# Altium PCB TMC2209_V30.PcbDoc
Units mil, origin at the board's own origin, x right, y up, seen from the top; angles counter-clockwise.
Board outline 590 x 800 mil, 4 copper layers (Top Layer, Signal Layer 1, Signal Layer 2, Bottom Layer), stack 63.036 mil thick; 22 components, 28 nets, 86 pads, 58 vias.
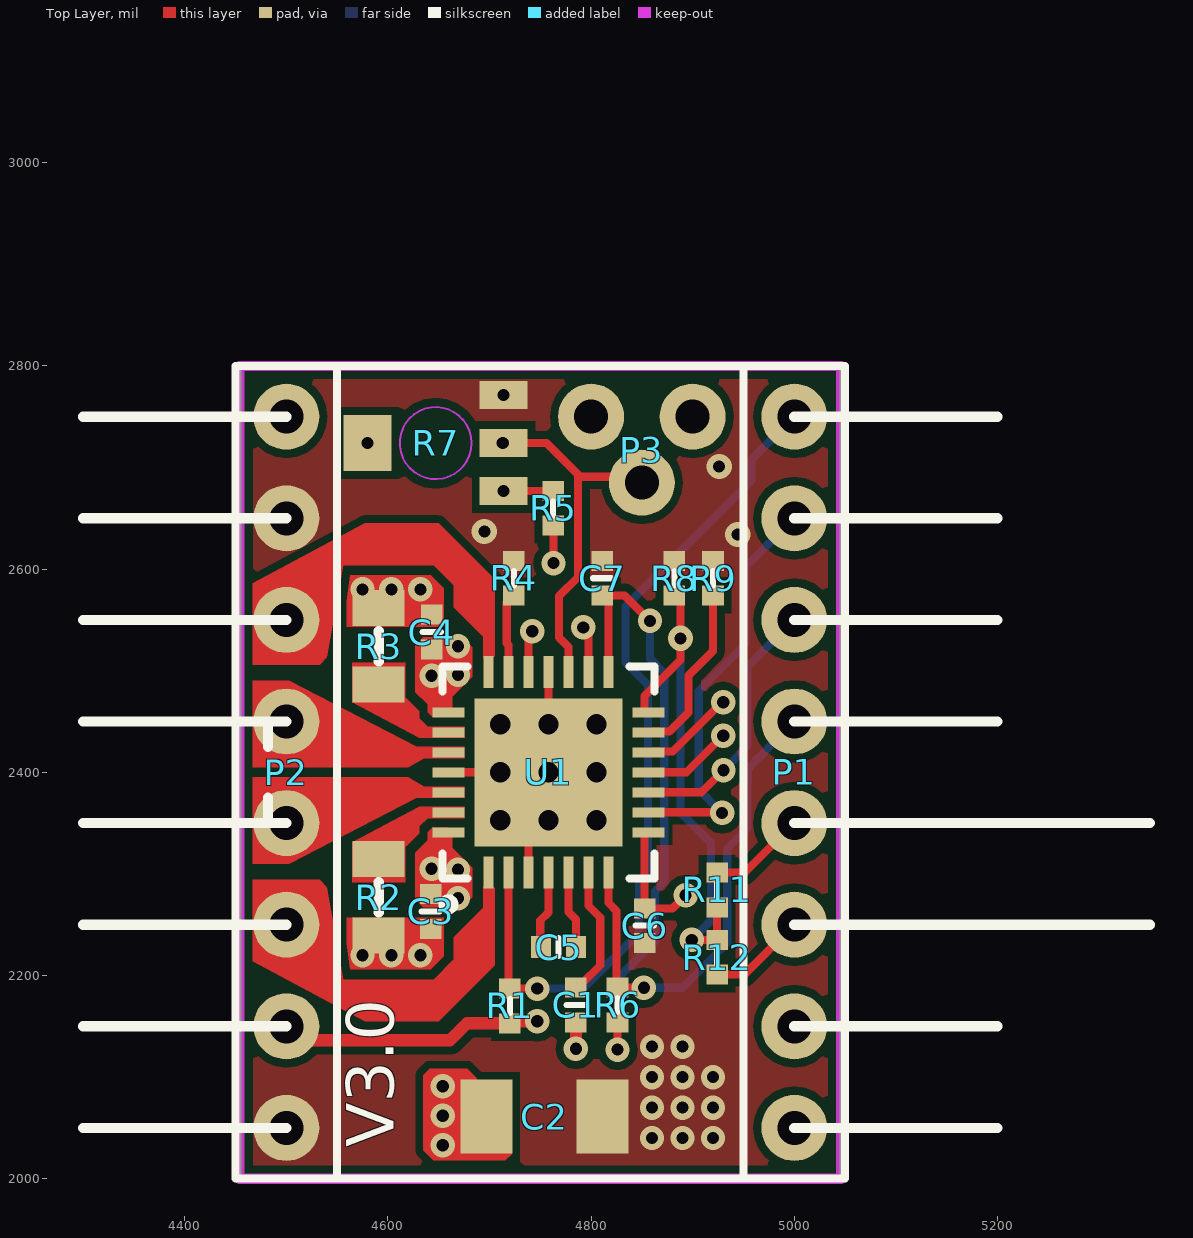
[diagram p0: Top Layer view]
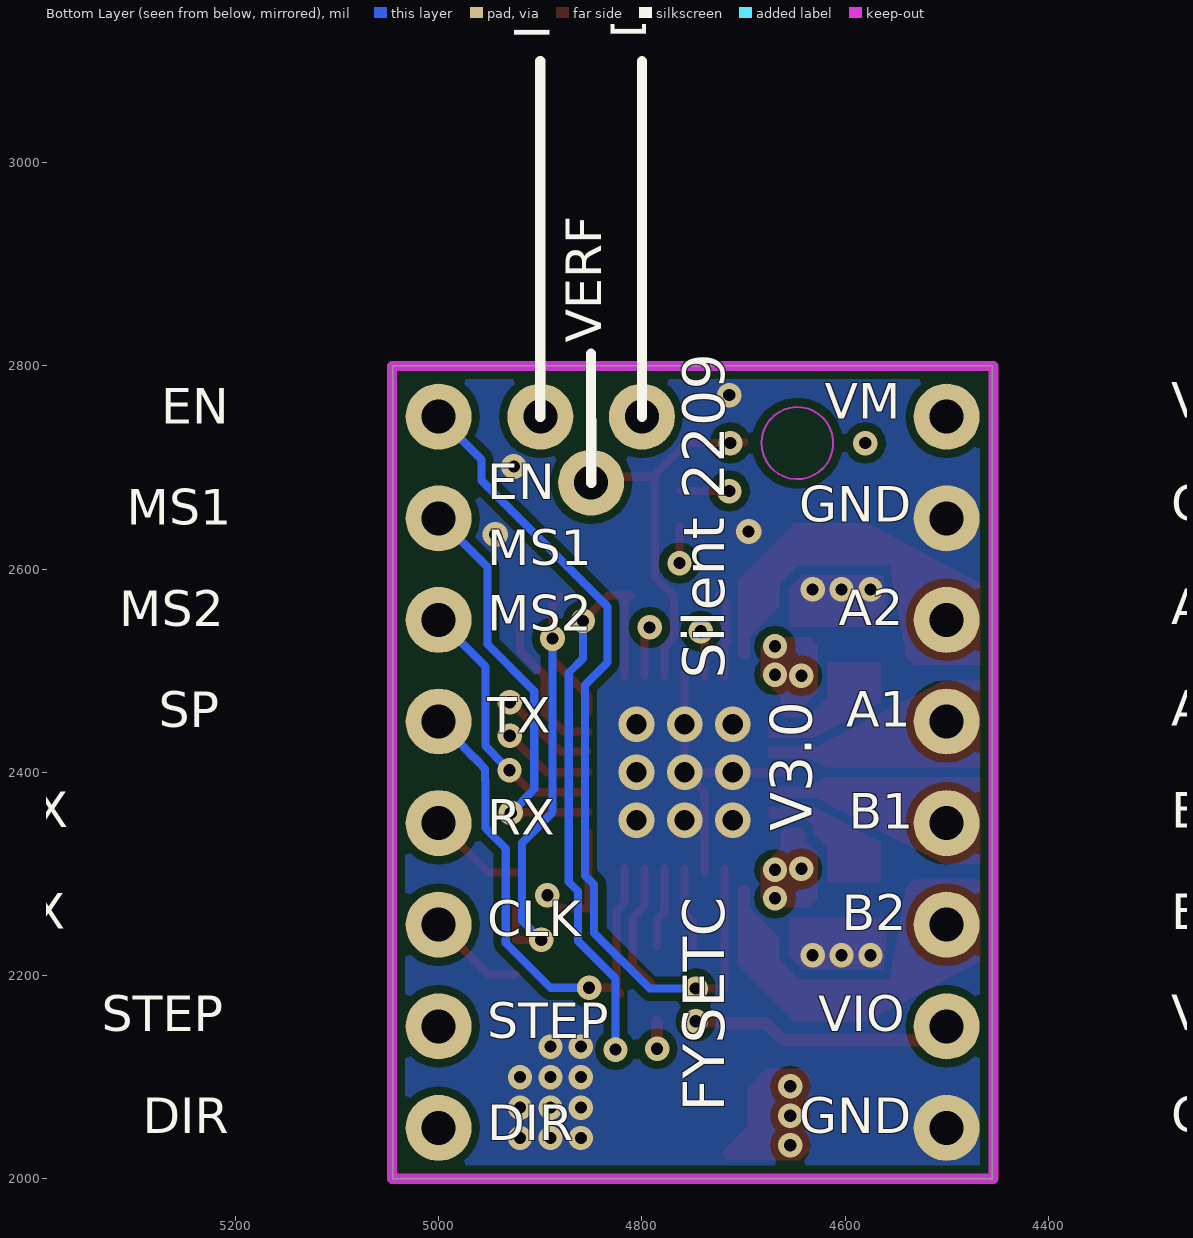
[diagram p1: Bottom Layer view, seen from below]
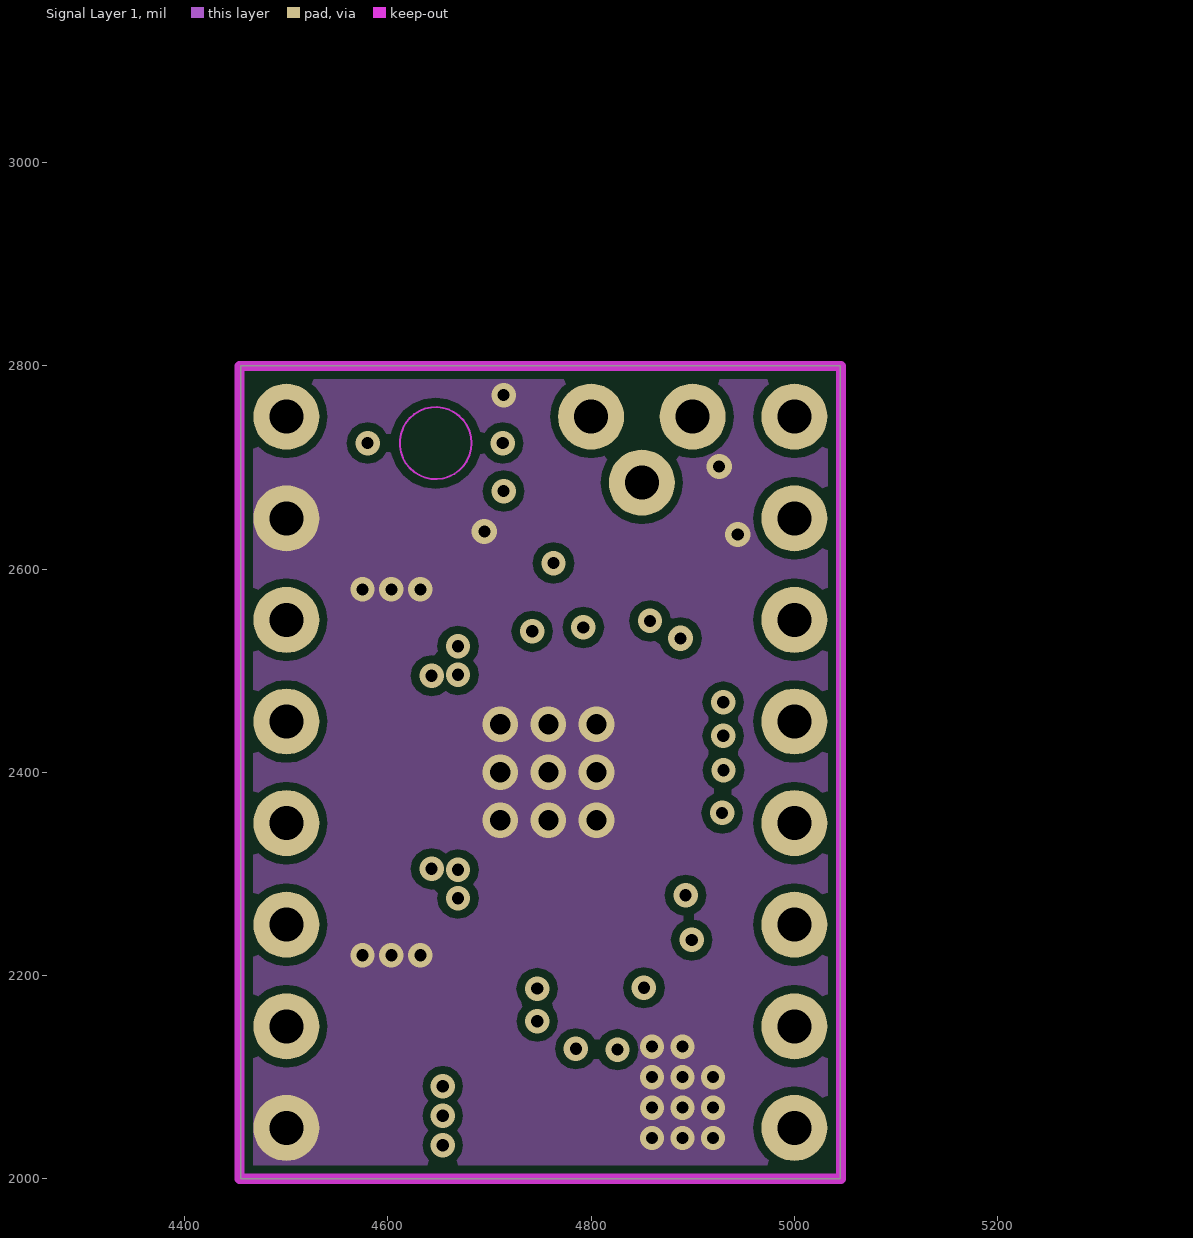
[diagram p2: Signal Layer 1]
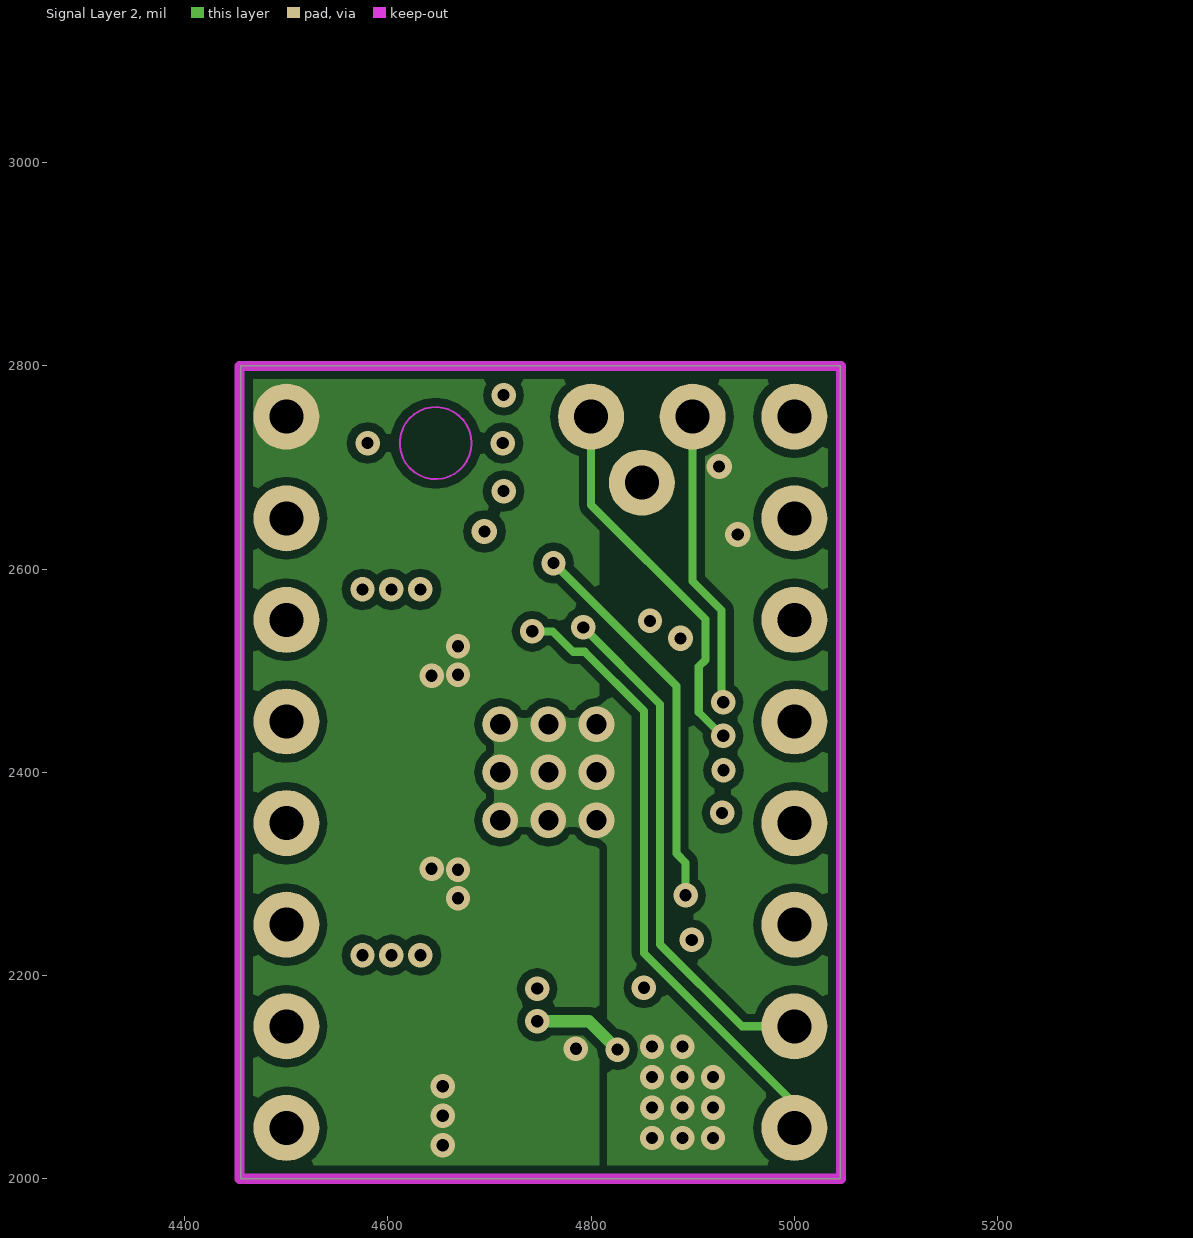
[diagram p3: Signal Layer 2]
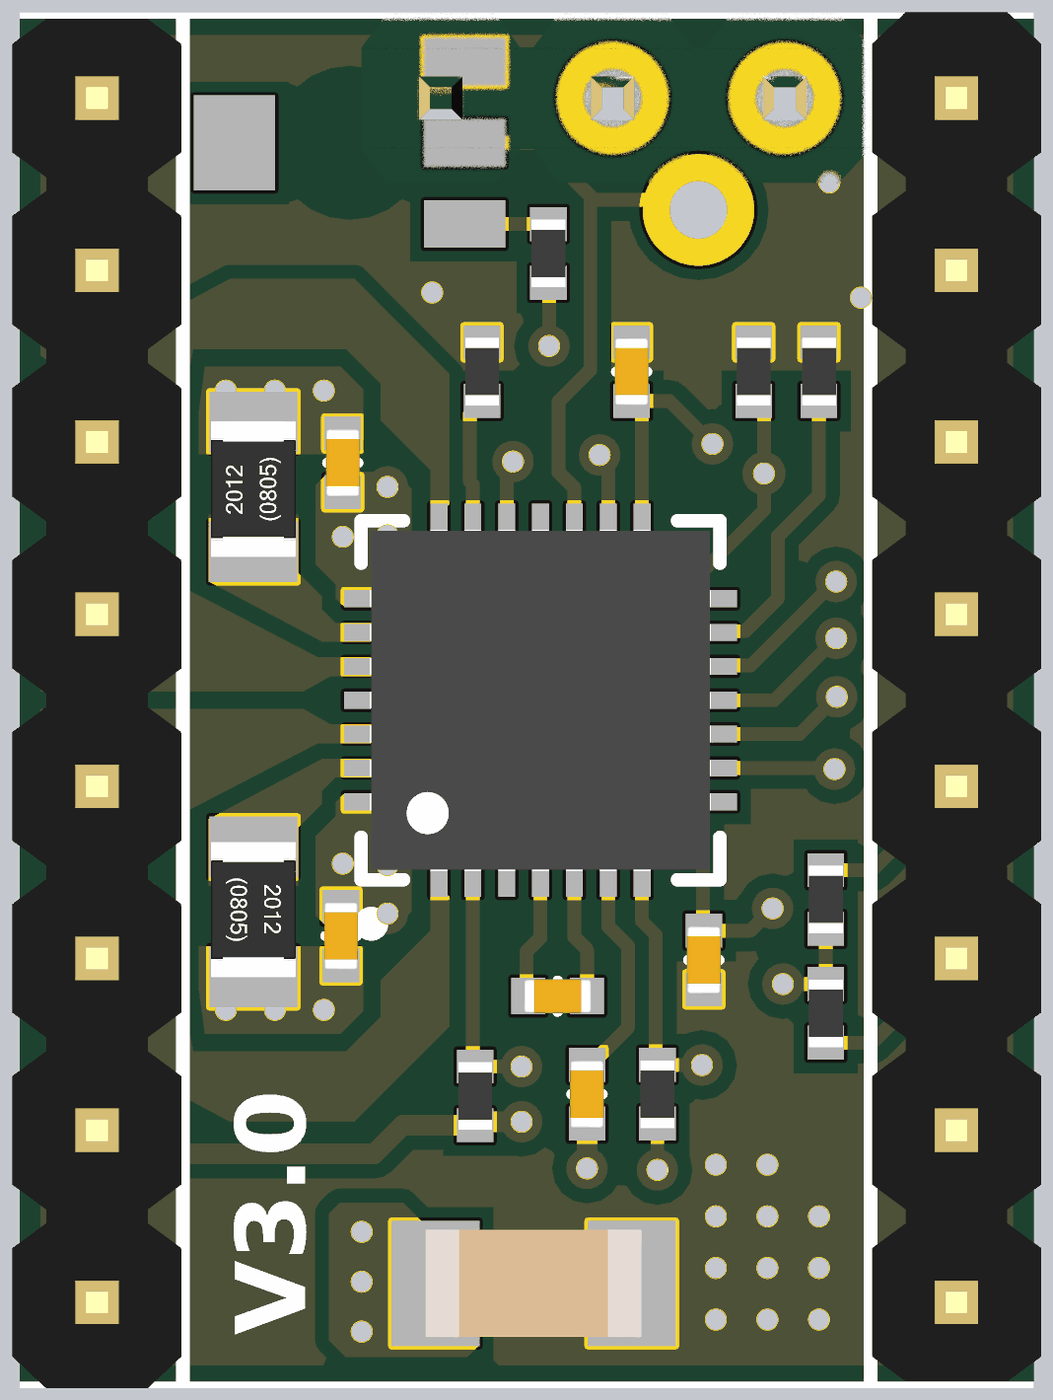
[diagram p4: 3D render of the assembled board from above, using the file's embedded part models]

## Layer stack, top to bottom
Top Solder: solder mask 0.4, Solder Resist, Dk 3.5
Top Layer: signal copper 1.4
Dielectric 1: core 10, FR-4, Dk 4.2
Signal Layer 1: signal copper 1.4173
Dielectric 3: prepreg 37.4016, Dk 4.2
Signal Layer 2: signal copper 1.4173
Dielectric 2: core 10, Dk 4.2
Bottom Layer: signal copper 1.4
Bottom Solder: solder mask 0.4, Solder Resist, Dk 3.5

## Board outline
4455,2000 5045,2000 5045,2800 4455,2800

## Design rules (kind name [scope] priority, off if disabled: settings)
Clearance [All] p1: gap=8 ignorepadtopadclearanceinfootprint=FALSE except(0: Arc-Hole Track-Hole SMDPad-Hole THPad-Hole Via-Hole Fill-Hole Poly-Hole Region-Hole Text-Hole)
PolygonConnect [All] p1: connectstyle=Direct reliefconductorwidth=10 reliefentries=4 polygonreliefangle="90 Angle" airgapwidth=10
RoutingVias [All] p1: holewidth=12 width=24 viastyle="Through Hole" minholewidth=10 minwidth=20 maxholewidth=20 maxwidth=50
SolderMaskExpansion [All] p1: expansion=4
Width [All] p1: maxlimit=50 minlimit=6 preferedwidth=8
30 further rules are at their usual default settings.

## Components (designator, comment, footprint, x,y, rotation, side; value= is the part's Value field where it differs from the comment)
C1 "100nF" CAP0402_NS 4785.03,2171 r90 top
C2 "4.7uF/35V" CAP1206 4754,2061 r180 top
C3 "100nF" CAP0402_NS 4642,2263 r90 top
C4 "100nF" CAP0402_NS 4643,2538 r270 top
C5 "22nF" CAP0402_NS 4768,2227.99 r0 top
C6 "4.7uF/6.3V" CAP0402_NS 4853,2249 r270 top
C7 "100nF" CAP0402_NS 4811,2591 r90 top
P1 "Header 8" "Header 1X8" 5000,2050 r90 top
P2 "Header 8" "Header 1X8" 4500,2750 r270 top
P3 "Header 3" "Header 1X3" 4900,2750 r180 top
R1 "20K" RES0402_NS 4720,2170 r270 top
R2 "0.11R" RES0805_NS 4591,2277 r270 top
R3 "0.11R" RES0805_NS 4591,2524 r90 top
R4 "100K" RES0402_NS 4724,2591.01 r270 top
R5 "10K" RES0402_NS 4762.63,2659.71 r270 top
R6 "NC" RES0402_NS 4826,2171 r270 top
R7 "10K" 4脚贴片电位器 4647,2724 r180 top
R8 "20K" RES0402_NS 4882,2591.01 r270 top
R9 "0R" RES0402_NS 4920,2591.01 r270 top
R11 "0R" RES0402_NS 4924,2284.17 r90 top
R12 "1K" RES0402_NS 4924,2218 r90 top
U1 "TMC2209" "QFN28 (2209)" 4758,2400 r90 top locked

## Footprints (in the part's own frame and the unit in brackets; to place one, negate y for a bottom-side part, rotate by r counter-clockwise, add the part's x,y. Pads: shape width x height; smd on the part's side, far side on the other; paste and mask are expansions set on the pad)
4脚贴片电位器 [mm]
  rect 1.2x0.7 smd mask+0.05: 1(-1.7,1.2) 2(-1.7,-1.2) 3(-1.7,0)
  rect 1.2x1.4 smd mask+0.05: 4(1.7,0)
  Keep-Out Layer circle w0.05: c0,0 r0.9
CAP0402_NS [mm]
  rect 0.5x0.54 smd mask+0.05: 1(-0.433,0) 2(0.433,0)
  silkscreen extent 0,-0.23 0,0.23, body extent -0.5,-0.25 0.5,0.25, height 0.5
CAP1206 [mm]
  rect 1.3x1.85 smd mask+0.05: 1(-1.45,0) 2(1.45,0)
  body extent -1.6,-0.8 1.6,0.8, height 0.77
"Header 1X3" [mm]
  round 1.65 hole 0.85 mask+0.05: 1(0,0) 2(2.54,0) 3(1.273,1.651)
  body extent -1.27,-1.25 6.25,1.25, height 8.2
"Header 1X8" [mm]
  round 1.65 hole 0.85 mask+0.05: 1(0,0) 2(2.54,0) 3(5.08,0) 4(7.62,0) 5(10.16,0) 6(12.7,0) 7(15.24,0) 8(17.78,0)
  silkscreen extent -1.27,-1.27 19.05,1.27, body extent -1.17,-1.25 19.05,1.25, height 8.2
"QFN28 (2209)" [mm]
  rect 0.8x0.25 smd mask+0.05: 1(-2.503,1.5) 2(-2.503,1) 3(-2.503,0.5) 4(-2.503,0) 5(-2.503,-0.5) 6(-2.503,-1) 7(-2.503,-1.5) 15(2.503,-1.5) 16(2.503,-1) 17(2.503,-0.5) 18(2.503,0) 19(2.503,0.5) 20(2.503,1) 21(2.503,1.5)
  rect 0.25x0.8 smd mask+0.05: 8(-1.5,-2.503) 9(-1,-2.503) 10(-0.5,-2.503) 11(0,-2.503) 12(0.5,-2.503) 13(1,-2.503) 14(1.5,-2.503) 22(1.5,2.503) 23(1,2.503) 24(0.5,2.503) 25(0,2.503) 26(-0.5,2.503) 27(-1,2.503) 28(-1.5,2.503)
  rect 3.7x3.7 smd mask+0.05: EXPAD(0,0)
  silkscreen extent -3.42,-2.65 2.65,2.65, body extent -2.52,-2.52 2.52,2.52, height 0.85
RES0402_NS [mm]
  rect 0.5x0.54 smd mask+0.05: 1(-0.433,0) 2(0.433,0)
  silkscreen extent -0.18,0 0.18,0, body extent -0.5,-0.25 0.5,0.25, height 0.5
RES0805_NS [mm]
  rect 0.9x1.3 smd mask+0.05: 1(-0.958,0) 2(0.958,0)
  silkscreen extent -0.38,0 0.38,0, body extent -1.03,-0.62 0.97,0.63, height 0.44

## Part data
C1 C2 C3 C4 C5 C6 C7: library part Capacitor
P1 P2: "Header, 8-Pin", LatestRevisionDate=17-Jul-2002, LatestRevisionNote="Re-released for DXP Platform.", Publisher="Altium Limited"
P3: "Header, 3-Pin", LatestRevisionDate=17-Jul-2002, LatestRevisionNote="Re-released for DXP Platform.", Publisher="Altium Limited"
R1 R2 R3 R4 R5 R6 R8 R9 R11 R12: library part Resistor
R7: library part Potentiometer

## Via types
v1: diameter 24, hole 12, Top Layer to Bottom Layer, tented both sides, 45 vias
v2: diameter 35, hole 20, Top Layer to Bottom Layer, 9 vias
v3: diameter 25, hole 12, Top Layer to Bottom Layer, tented both sides, 4 vias

## Nets (pads, with @x,y where several pads share a name; then routed paths per layer and width w, separated by ;. In a path a pad name is that pad's centre, name@x,y a point inside that pad or via, vN(x,y) a via of type N, cw(c..) or ccw(c..) an arc to the next point about the centre after c; other vN are vias at no path point)
5VOUT: C6.1 R5.2 U1.8 | length 537.4
  Top Layer w8: R5.2 4763,2642.3 v1(4763,2605.89) ; C6.1@4852.49,2266.57 U1.8@4852.49,2340.94 ; C6.1 4880.06,2266.06 v1(4893,2279)
  Signal Layer 2 w8: v1(4763,2605.89) 4884,2484.89 4884,2320 4893,2311 v1(4893,2279)
CLK: R9.2 U1.13 | length 176.5
  Top Layer w8: U1.13@4852.49,2439.37 4853.27,2440.16 4877.16,2440.16 4896,2459 4896,2495.39 4920,2519.39 R9.2
DIAG: P3.2 U1.11 | length 466.2
  Top Layer w8: U1.11@4852.49,2400 U1.11 4894,2400 v1(4930,2436)
  Signal Layer 2 w8: P3.2 4800,2663.11 4912.5,2550.61 4912.5,2510.5 4906,2504 4906,2459.06 4929.06,2436 v1(4930,2436)
DIR: P1.1 U1.19 | length 673.8
  Top Layer w8: U1.19@4738.31,2494.49 4738.31,2539.06 v1@4742,2542.75
  Signal Layer 2 w8: v1(4742,2538.75) 4762.26,2538.75 4782.43,2518.58 4793.74,2518.58 4851.95,2460.37 4851.95,2221.89 5002.92,2070.92 P1.1@4982,2050
EN: P1.8 R1.1 U1.2 | length 857.8
  Top Layer w8: R1.1@4718.63,2187.05 U1.2 U1.2@4718.63,2305.51 ; R1.1 v1(4746.95,2187.05)
  Bottom Layer w8: v1(4746.95,2187.05) 4792.05,2187.05 4847,2242 4847,2289.57 4856,2298.57 4856,2486 4834,2508 4834,2563 4958,2687 4958,2708 P1.8
GND: C2.1 C3.1 C4.1 C6.2 C7.2 P2.2 P2.8 R2.2 R3.2 R4.1 R7.2 R8.1 R9.1 U1.3 U1.18 U1.25 U1.EXPAD | length 303.8
  Top Layer w8: U1.25 4709.69,2400 v2(4758,2400) ; U1.3 4738.31,2380.32 v2(4758,2400) ; U1.18 4758,2448.31 v2(4758,2400)
  other v1: 4860,2040 4890,2040 4920,2040 4860,2070 4890,2070 4920,2070 4860,2100 4890,2100 4920,2100 4860,2130 4890,2130 4575,2220 4603.5,2220 4632,2220 4575,2580 4603.5,2580 4632,2580 4713.93,2771.24
  other v2: 4710.69,2352.69 4758,2352.69 4805.31,2352.69 4710.69,2400 4805.31,2400 4710.69,2447.31 4758,2447.31 4805.31,2447.31
  other v3: 4944.35,2634 4695,2637 4926,2701
INDEX: P3.1 U1.12 | length 390.2
  Top Layer w8: U1.12@4853.43,2420.31 4880.37,2420.31 4929.06,2469 v1(4930,2469)
  Signal Layer 2 w8: P3.1 4900,2588 4928.5,2559.5 4928.5,2470.5 v1(4930,2469)
MS1: P1.7 U1.9 | length 415.2
  Top Layer w8: U1.9@4852.49,2360.63 U1.9 4928.37,2360.63 v1(4929,2360)
  Bottom Layer w8: v1(4929,2360) 4906,2383 4906,2480 4952,2526 4952,2602 P1.7
MS2: P1.6 U1.10 | length 259.6
  Top Layer w8: U1.10 4908.63,2380.32 v1(4930.31,2402)
  Bottom Layer w8: v1(4930.31,2402) 4945,2416.69 4945,2417.06 4954,2426.06 4954,2426.63 4954,2504 P1.6
NetC1_2: C1.2 U1.6 | length 125.8
  Top Layer w8: C1.2@4791,2192 4809,2210 4809,2257 4797.37,2268.63 U1.6@4797.37,2305.51
NetC5_1: C5.1 U1.4 | length 80.8
  Top Layer w8: C5.1@4749.94,2228 4749.94,2253.94 4758,2262 U1.4@4758,2305.51
NetC5_2: C5.2 U1.5 | length 79.6
  Top Layer w8: U1.5@4777.69,2305.51 4777.69,2262.32 4785,2255 C5.2@4785,2228.97
NetR2_1: R2.1 U1.27
NetR3_1: R3.1 U1.23
NetR5_1: R5.1 R7.1 | length 48.7
  Top Layer w8: v1(4713.93,2676.76) R5.1
OUTA1: P2.4 U1.24
OUTA2: P2.3 U1.21
OUTB1: P2.5 U1.26
OUTB2: P2.6 U1.1
RX: P1.4 R11.2 | length 99.9
  Top Layer w8: R11.2 4951.21,2301.21 P1.4 P1.4@4997.41,2352.59
SPREAD: P1.5 R6.1 U1.7 | length 514.1
  Top Layer w8: U1.7@4817.06,2305.51 U1.7 4817.06,2271.57 4825,2263.63 R6.1@4825,2187.95 ; R6.1@4821.05,2182 4825,2185.95 R6.1@4825,2187.95 ; v1(4851.95,2187.95) R6.1@4825,2187.95
  Bottom Layer w8: v1(4851.95,2187.95) 4889.95,2187.95 4934,2232 4934,2325 4954,2345 4954,2391.74 4954.31,2392.06 4954.31,2403.37 4961,2410.06 ; P1.5 4975.88,2425.88 4975.88,2425.31 4970,2419.43 ; 4961,2410.06 4970,2419.06 4970,2419.43 ; 4961,2410.06 4961,2410.43 4970,2419.43
STDBY: R4.2 U1.20 | length 83.1
  Top Layer w8: U1.20@4718.63,2494.49 U1.20 4718.63,2525.43 4717,2527.06 4717,2566.97 R4.2
STEP: P1.2 U1.16 | length 552.9
  Top Layer w8: U1.16@4797.37,2494.49 v1@4797.37,2538.58
  Signal Layer 2 w8: v1(4792.37,2542.58) 4867.95,2467 4867.95,2230.51 4948.47,2150 P1.2
TX: P1.3 R12.1 | length 102.7
  Top Layer w8: R12.1 4950.95,2200.95 P1.3 P1.3@4995.47,2254.53
UART: R8.2 R11.1 R12.2 U1.14 | length 507.1
  Top Layer w8: U1.14@4852.49,2459.06 4852.49,2475.02 4888,2510.54 v3(4888,2531.8) 4888,2565.97 R8.2@4880,2573.97 ; v1(4899,2235.05) R12.2 R11.1
  Bottom Layer w8: v3(4888,2531.8) 4888,2360.56 4918,2330.56 4918,2254.05 v1(4899,2235.05)
VCC_IO: C7.1 P2.7 R1.2 R6.2 U1.15 | length 980.4
  Top Layer w8: U1.15@4817.06,2494.49 U1.15 4817.06,2567.89 C7.1 4833.06,2573.94 v1(4858,2549) ; v1(4826,2127) R6.2
  Top Layer w12: P2.7 4500,2136.24 4661.24,2136.24 4677.95,2152.95 R1.2 4721.37,2151.59 4724.78,2155 v1(4747,2155)
  Signal Layer 2 w12: v1(4747,2155) 4798,2155 v1(4826,2127)
  Bottom Layer w8: v1@4821,2127 v1@4826,2132 ; v1(4826,2127) v1@4826,2132 ; v1(4858,2549) 4858,2512 4872,2498 4872,2291.94 4863,2282.94 4863,2234 4826,2197 v1@4826,2132
VM: C1.1 C2.2 C3.2 C4.2 P2.1 U1.22 U1.28 | length 26.1
  Top Layer w12: v1(4785.03,2127.86) C1.1
  other v1: 4654,2033 4654,2062 4654,2091 4669,2276 4669,2304 4643,2305 4643,2495 4669,2496 4669,2524
VREF: P3.3 R7.3 U1.17 | length 373.6
  Top Layer w8: R7.3@4698.93,2725 4699.93,2724 v1(4713,2724) ; R7.3 4756,2724 4787,2693 ; U1.17@4777.69,2494.49 U1.17 4777.69,2523.33 4768.37,2532.64 4768.37,2573.37 4787,2592 4787,2690.83 4844.06,2690.83 P3.3
pads on no net: R7.4
copper on no net:
  other v1: 4580.07,2724

## Polygon pours and split planes (outlines as drawn)
GND on Signal Layer 2 "Signal Layer 2-GND" (solid, pour order 10): 4816,2472 4814.31,2473.69 4702.43,2473.69 4684.68,2455.95 4684.68,2349.41 4708.7,2325.39 4816,2325.39 4816,2000.69 5042.01,2000.69 5042.01,2798.69 4816,2798.69
VM on Signal Layer 2 "Signal Layer 2-VM" (solid, pour order 2): 4454,2800 4454,2000 4805,2000 4808,1997 4808,2799 4807,2800
GND on Signal Layer 1 "Signal Layer 1-GND" (solid, pour order 4): 4450,2800 4450,2000 5046,2000 5046,2800
GND on Bottom Layer "NONET_L01_P-001" (solid, pour order 12): 4454,2800 4454,2000 5046,2000 5046,2800
GND on Top Layer "NONET_L01_P-001" (solid, pour order 14): 4454,2800 4454,2000 5046,2000 5046,2800

## Keep-outs
Keep-Out Layer:
  lines w10: 4454,2000 4454,2800 5046,2800 5046,2000 4454,2000

## Other copper
Top Layer:
  pour cut-out: 4659.46,2340.94 4698.94,2301.46 4817.06,2301.46 4856.54,2340.94 4856.54,2459.06 4817.06,2498.54 4698.94,2498.54 4659.46,2459.06
  region net VM: 4641,2108 4635,2102 4635,2028 4644.75,2018.25 4715.69,2018.25 4722.22,2024.78 4696,2052.57 4696,2090 4678,2108
  region net OUTB1: 4675,2386 4636,2386 4620,2395 4467,2395 4467,2310 4503,2310 4628.64,2375 4675,2375
  region net OUTB2: 4665,2216 4665,2237.5 4694,2266.5 4694,2288 4703,2288 4705,2286 4705,2210 4650,2155 4577.33,2155 4467,2214.09 4467,2294 4533,2294 4540,2287 4555.97,2196 4645,2196
  region net NetR2_1: 4675,2355 4639,2355 4631,2347 4631,2340 4617,2326 4617,2292 4565,2292 4565,2331 4631.05,2366 4675,2366
  region net VM: 4683,2277 4673,2267 4635,2267 4627,2275 4627,2321 4639,2333 4639,2341 4643.5,2345.5 4658.96,2345.5 4663.51,2340.94 4663.51,2325.49 4683,2306
  region net GND: 4559.28,2231.5 4559.28,2257 4655,2257 4655,2219 4642,2206 4562.78,2206
  region net GND: 4559.28,2568.5 4559.28,2543 4655,2543 4655,2581 4642,2594 4562.78,2594
  region net OUTA2: 4665,2584 4665,2562.5 4694,2533.5 4694,2512 4703,2512 4705,2514 4705,2590 4650,2645 4577.33,2645 4467,2585.91 4467,2506 4533,2506 4540,2513 4555.97,2604 4645,2604
  region net VM: 4683,2523 4673,2533 4635,2533 4627,2525 4627,2479 4639,2467 4639,2459 4643.5,2454.5 4658.96,2454.5 4663.51,2459.06 4663.51,2474.51 4683,2494
  region net NetR3_1: 4675,2445 4639,2445 4631,2453 4631,2460 4617,2474 4617,2508 4565,2508 4565,2469 4631.05,2434 4675,2434
  region net OUTA1: 4675,2414 4636,2414 4620,2405 4577.86,2405 4467,2405 4467,2490 4503,2490 4628.64,2425 4675,2425

## Silkscreen, mask and mechanical layers (free items; w line width, h text height)
Top Overlay:
  lines w8: 4550,2000 4954,2000 ; 4550,2800 4954,2800
  lines w10: 4300,2050 4500,2050 ; 4300,2150 4500,2150 ; 4300,2250 4500,2250 ; 4300,2350 4500,2350 ; 4300,2450 4500,2450 ; 4300,2550 4500,2550 ; 4300,2650 4500,2650 ; 4300,2750 4500,2750 ; 4482,2350 4482,2375 ; 4482,2425 4482,2450 ; 5000,2050 5200,2050 ; 5000,2150 5200,2150 ; 5000,2250 5350,2250 ; 5000,2350 5350,2350 ; 5000,2450 5200,2450 ; 5000,2550 5200,2550 ; 5000,2650 5200,2650 ; 5000,2750 5200,2750
  text "V3.0" at 4621,2031 h80 r90
Bottom Overlay:
  lines w10: 4800,2750 4800,3100 ; 4849.89,2685 4850,2812 ; 4900,2750 4900,3100
  text "DIAG" at 4784,3122 h60 r270
  text "INDEX" at 4879,3121 h60 r270
  text "VERF" at 4828,2823 h60 r270
  text "VM" at 4278.95,2737.08 h60
  text "VM" at 4620.09,2736.08 h60
  text "EN" at 5273,2731 h60
  text "EN" at 4952,2657 h60
  text "GND" at 4278.95,2635.7 h60
  text "GND" at 4644.95,2634.7 h60
  text "MS1" at 5306.97,2631.78 h60
  text "MS1" at 4952,2592 h60
  text "A2" at 4278.9,2533.87 h60
  text "A2" at 4606.27,2532.87 h60
  text "MS2" at 5314.24,2532.07 h60
  text "MS2" at 4952,2527.43 h60
  text "Silent 2209" at 4705,2492 h70 r270
  text "A1" at 4278.9,2433.76 h60
  text "A1" at 4599,2432.76 h60
  text "SP" at 5275.39,2432.36 h60
  text "TX" at 4952,2427.14 h60
  text "V3.0" at 4619,2342 h70 r270
  text "B1" at 4278.9,2333.66 h60
  text "RX" at 5431.44,2334.14 h60
  text "B1" at 4596.17,2332.66 h60
  text "RX" at 4952,2326.86 h60
  text "B2" at 4278.9,2233.56 h60
  text "TX" at 5430.77,2234.43 h60
  text "B2" at 4603.44,2232.56 h60
  text "CLK" at 4952.06,2226.57 h60
  text "VIO" at 4278.95,2134.18 h60
  text "VIO" at 4626.53,2133.18 h60
  text "STEP" at 5331.77,2133.21 h60
  text "STEP" at 4952.11,2126.29 h60
  text "FYSETC" at 4705,2066 h70 r270
  text "GND" at 4278.95,2034.08 h60
  text "GND" at 4644.95,2033.08 h60
  text "DIR" at 5291.43,2033 h60
  text "DIR" at 4952,2026 h60
Bottom Solder:
  rectangle: 4686,2327 4830,2473